# EAGLE board rw-linear-17mm-mk-1.4 (EAGLE 7.5.0)
VERSION: v1.4
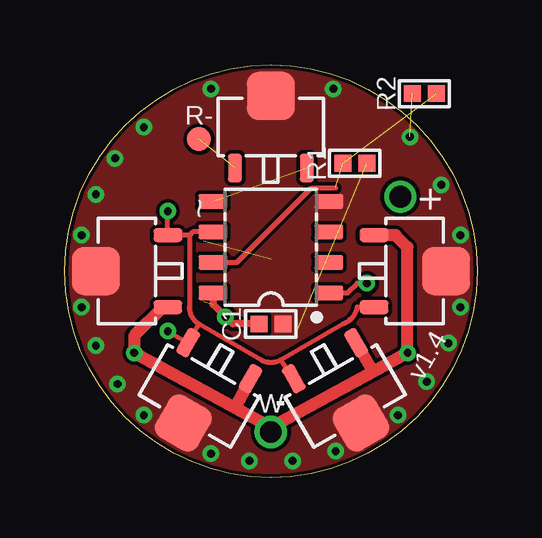
[diagram p0: board, top side]
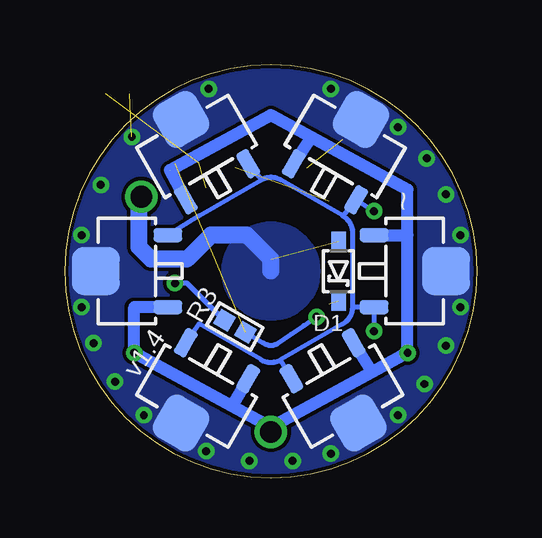
[diagram p1: board, bottom side, seen from below]

Size 17.2 x 17.2 mm. Coordinates in mm from the lower left corner, seen from the top.
Outline: 0,8.6 arc-180 17.2,8.6 arc-180 0,8.6
Copper layers (1*16): Top 0.0356mm / dielectric 1.5011mm / Bottom 0.0356mm
Design rules "LaenPCBOrder2": minimum track width 6mil, minimum drill 13mil, track to track 6mil, track to pad 6mil, pad to pad 6mil, via to via 6mil, smd to smd 6mil, copper to edge 6mil, drill to drill 6mil, minimum pad ring 7mil, minimum via ring 7mil, stop-mask expansion 3mil, vias tented up to drill 20mil, thermal gap 10mil

## Footprints (pad centres in the part's own frame; a part is rotated, then mirrored left to right if it is on the bottom)
1X01-0.9MM-CIR = drill 0.9 pad 1.3: P$1 0,0
C0402 = smd 0.7 x 0.7: 1 -0.5,0; 2 0.5,0
SOD323-SCHOTTKY = smd 0.8 x 0.6: A -1.25,0; C 1.25,0
R0402 = smd 0.7 x 0.7: 1 -0.5,0; 2 0.5,0
1X01-SMD-1MM-DIA-NS = smd 1 x 1: P$1 0,0
SO08-NARROWER = smd 0.6 x 1.2: 1 -1.905,-2.416; 2 -0.635,-2.416; 3 0.635,-2.416; 4 1.905,-2.416; 5 1.905,2.416; 6 0.635,2.416; 7 -0.635,2.416; 8 -1.905,2.416
SOT89-NOTHERM-ROUNDED-LESS = smd 0.58 x 1.2: 1 -1.5,-1.7; 3 1.5,-1.7 | smd 2 x 2: 4 0,1.3

## Placement (x,y rotation side)
+  M011X01-0.9MM-CIR  [1X01-0.9MM-CIR]  14,11.7 90 top
C1  1u  [C0402]  8.6,6.4 0 top
D1  BAT165  [SOD323-SCHOTTKY]  5.78,8.6 270 bottom
FRAME1  FRAME-LETTERNO_PACKAGE  [DUMMY]  0.1,0.1 0 top
R1  19K  [R0402]  12.1,13.1 0 top
R2  4K7  [R0402]  15,16 0 top
R3  10K  [R0402]  10.1,6.3 330 bottom
R-  M01SMD-1MM-DIA-NS  [1X01-SMD-1MM-DIA-NS]  5.6,14.1 90 top
U1  Tiny25  [SO08-NARROWER]  8.6,9.6 90 top
U2  AMC7135  [SOT89-NOTHERM-ROUNDED-LESS]  2.6,8.6 90 top
U3  AMC7135  [SOT89-NOTHERM-ROUNDED-LESS]  11.7,13.8 30 bottom
U4  AMC7135  [SOT89-NOTHERM-ROUNDED-LESS]  5.5,13.8 330 bottom
U5  AMC7135  [SOT89-NOTHERM-ROUNDED-LESS]  2.6,8.6 270 bottom
U6  AMC7135  [SOT89-NOTHERM-ROUNDED-LESS]  5.6,3.4 210 bottom
U7  AMC7135  [SOT89-NOTHERM-ROUNDED-LESS]  11.7,3.4 150 bottom
U8  AMC7135  [SOT89-NOTHERM-ROUNDED-LESS]  14.6,8.6 90 bottom
U9  AMC7135  [SOT89-NOTHERM-ROUNDED-LESS]  14.6,8.6 270 top
U10  AMC7135  [SOT89-NOTHERM-ROUNDED-LESS]  11.7,3.4 210 top
U11  AMC7135  [SOT89-NOTHERM-ROUNDED-LESS]  5.6,3.4 150 top
U12  AMC7135  [SOT89-NOTHERM-ROUNDED-LESS]  8.6,14.6 0 top
W  M011X01-0.9MM-CIR  [1X01-0.9MM-CIR]  8.6,1.9 270 top

## Library data of the parts
+ C1 D1 R1-R3 R- U1-U12 W = a_parts
FRAME1 = a_parts; DESIGNER: sean@yak.net; VERSION: v1.4

## Nets
3: U1.2
4: U1.3
BATT_DIV: R1.1 R2.2 U1.7
GND: C1.2 R2.1 U1.4 U2.4 U3.4 U4.4 U5.4 U6.4 U7.4 U8.4 U9.4 U10.4 U11.4 U12.4
N$1: R3.1 U1.1
PWM_R: U1.5 U12.3
PWM_W: U1.6 U2.3 U3.3 U4.3 U5.3 U6.3 U7.3 U8.3 U9.3 U10.3 U11.3
RED_K: R-.P$1 U12.1
VBAT: +.P$1 D1.A
VCC: C1.1 D1.C R1.2 R3.2 U1.8
WHITE_K: U2.1 U3.1 U4.1 U5.1 U6.1 U7.1 U8.1 U9.1 U10.1 U11.1 W.P$1

## Tracks (layer width: path | path; a pad name or v marks a point on that pad's centre or on a via)
BATT_DIV  (2 unrouted)
  Top 0.2: 11.3,12.07 10.3,12.07 7.19,8.97 U1.7
GND  (via drill 0.33)  (1 unrouted)
  other vias: 0.7,10.1 0.7,7.1 1.3,11.8 2.1,13.3 1.3,5.5 2.2,3.9 3.3,2.6 3.3,14.6 6.1,1 11.3,1.1 7.7,0.7 9.5,0.7 13.9,2.6 16.5,7.1 15.1,4 16,5.6 16.5,10.1 14.4,14.2 15.7,12.2 6.1,16.2 11.2,16.2
  pour Top (isolate 0.152, rank 6, no thermals): 0.1,8.6 arc90 8.6,0.1 arc90 17.1,8.6 arc90 8.6,17.1 arc90
  pour Bottom (isolate 0.152, rank 6, no thermals): 17.1,8.6 arc-90 8.6,0.1 arc-90 0.1,8.6 arc-90 8.6,17.1 arc-90
N$1  (via drill 0.33)
  Top 0.2: U1.1 11.79,7.7 12.2,8.1 v12.6,8.1
  Bottom 0.2: R3.1 10.55,6.55 12.1,8.1 v12.6,8.1
PWM_R  (1 unrouted)
PWM_W  (via drill 0.33)
  Top 0.2: 5.6,6.4 8.2,4.9 arc60 9,4.9 | 9,4.9 11.6,6.4 arc61 12.2,7.1 U9.3 | 5.6,6.4 U11.3 v4.3,6.1 | U10.3 9,4.9 | 5.2,10.1 5.2,7.1 arc59 5.6,6.4 | v4.3,11.1 U2.3 5.2,10.1 | U1.6 5.33,10.24 5.2,10.1
  Bottom 0.2: 5.2,7.1 5.2,10.1 arc-67 5.6,10.9 | 8.2,4.9 5.6,6.4 arc-59 5.2,7.1 | 9,12.4 11.6,10.9 U8.3 | 5.6,10.9 U4.3 v4.3,11.1 | U3.3 9.36,12.85 9,12.4 | 8.2,4.9 arc60 9,4.9 11.6,6.4 U7.3 | U6.3 8.2,4.9 | v4.3,6.1 U5.3 5.2,7.1 | 5.6,10.9 8.2,12.4 arc-60 9,12.4
RED_K  (1 unrouted)
VBAT  (1 unrouted)
  Bottom 0.7: 8.6,8.6 8.6,9.1 9.6,10.1 11.1,10.1 12.1,9.1 13.6,9.1 14.1,9.6 14.1,11.6 +.P$1
  pour Bottom (isolate 0.152, no thermals): 6.6,8.6 arc-180 10.6,8.6 arc-180
VCC  (via drill 0.33)  (2 unrouted)
  Top 0.3: U1.8 6.18,7.22 v6.7,6.7 7,6.4 C1.1
  Bottom 0.2: R3.2 8.9,5.6 arc-68 8.3,5.6 arc-1 v6.7,6.7
WHITE_K  (via drill 0.33)  (1 unrouted)
  Top 0.5: 8.6,2.1 12.86,4.41 | 12.86,4.41 v14.3,5.2 14.3,9.6 13.8,10.1 U9.1 | U10.1 12.86,4.41 | 8.6,2.1 W.P$1 | 7.1,2.92 v2.9,5.2 2.9,5.9 4.1,7.1 U2.1 | 7.1,2.92 8.6,2.1 | U11.1 7.1,2.92
  Bottom 0.5: 2.9,10.1 v2.9,5.2 4.39,4.39 | 2.9,10.1 2.9,12 6.9,14.18 | 4.39,4.39 8.6,2.1 10.22,2.98 | 10.22,2.98 v14.3,5.2 14.3,7.1 U8.1 | 6.9,14.18 8.6,15.1 12.8,12.8 | U6.1 4.39,4.39 | U7.1 10.22,2.98 | U3.1 12.81,12.81 | U4.1 6.9,14.18 | U5.1 2.9,10.1

## Text on the board
tPlace: ~
bPlace: ~